# Altium PCB sunsensor.PcbDoc
Units mil, origin at the board's own origin, x right, y up, seen from the top; angles counter-clockwise.
Board outline 944.88 x 1181.1 mil, 2 copper layers (Top Layer, Bottom Layer), stack 60.4 mil thick; 56 components, 39 nets, 191 pads, 54 vias.
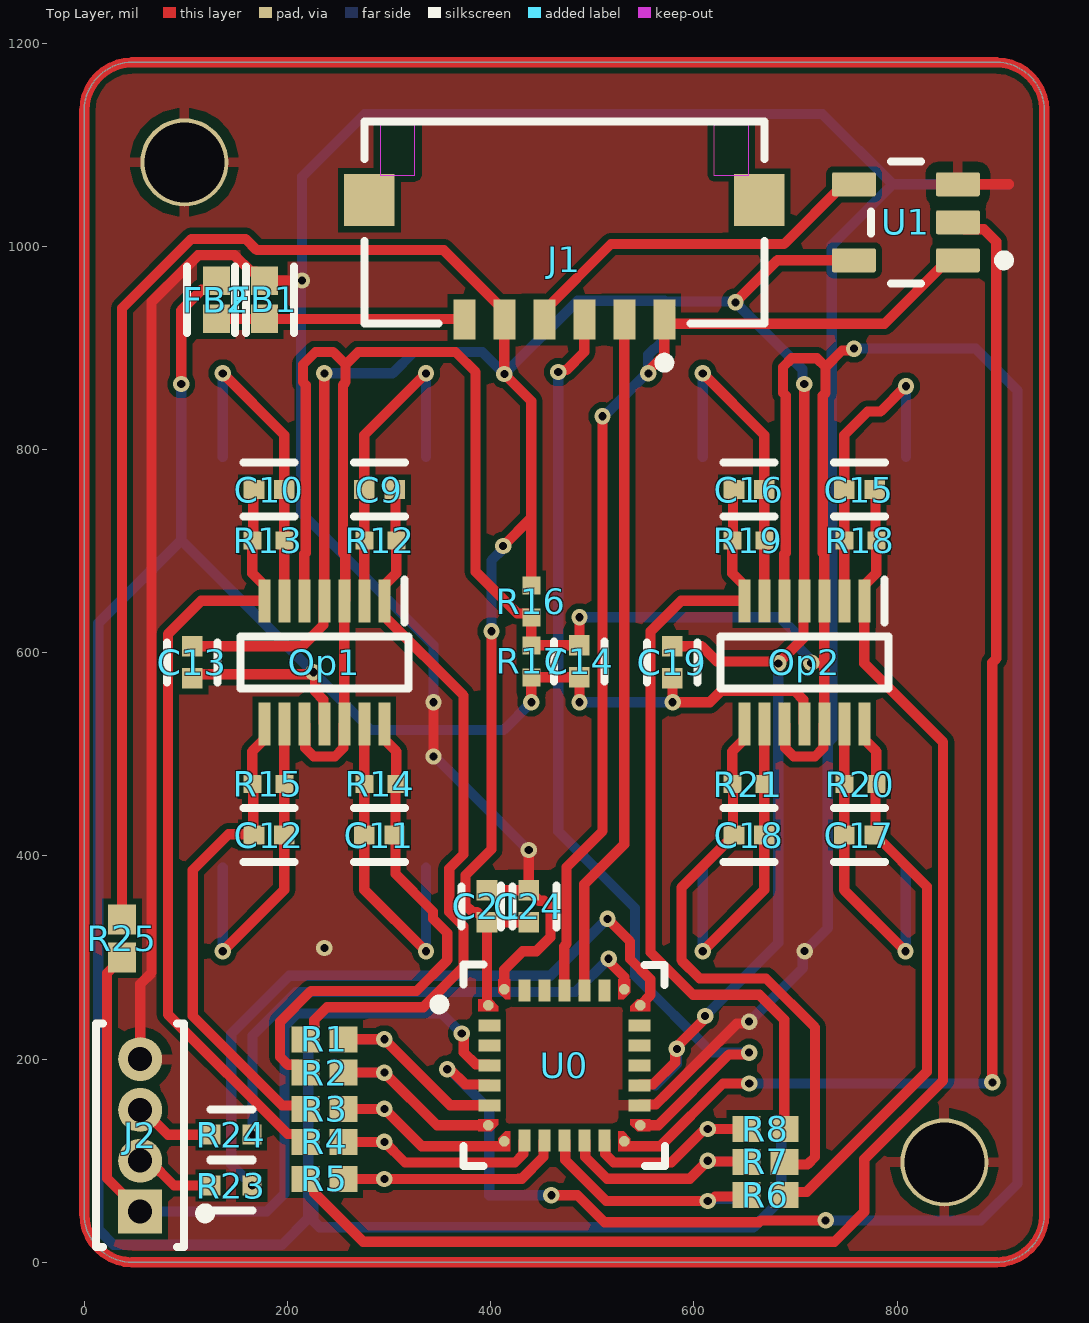
[diagram p0: Top Layer view]
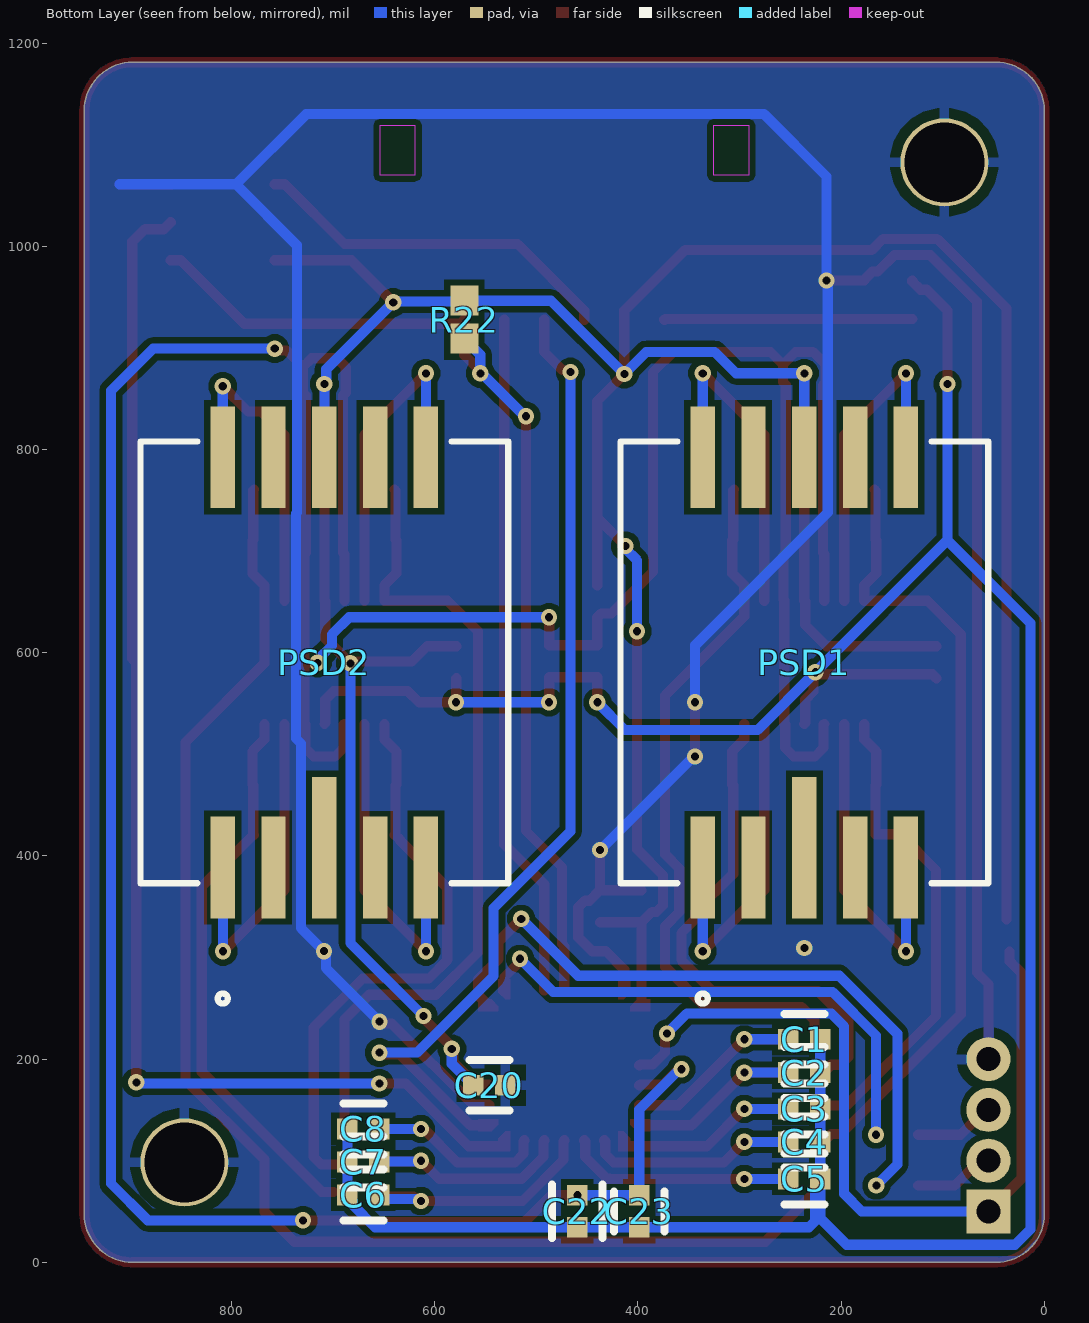
[diagram p1: Bottom Layer view, seen from below]
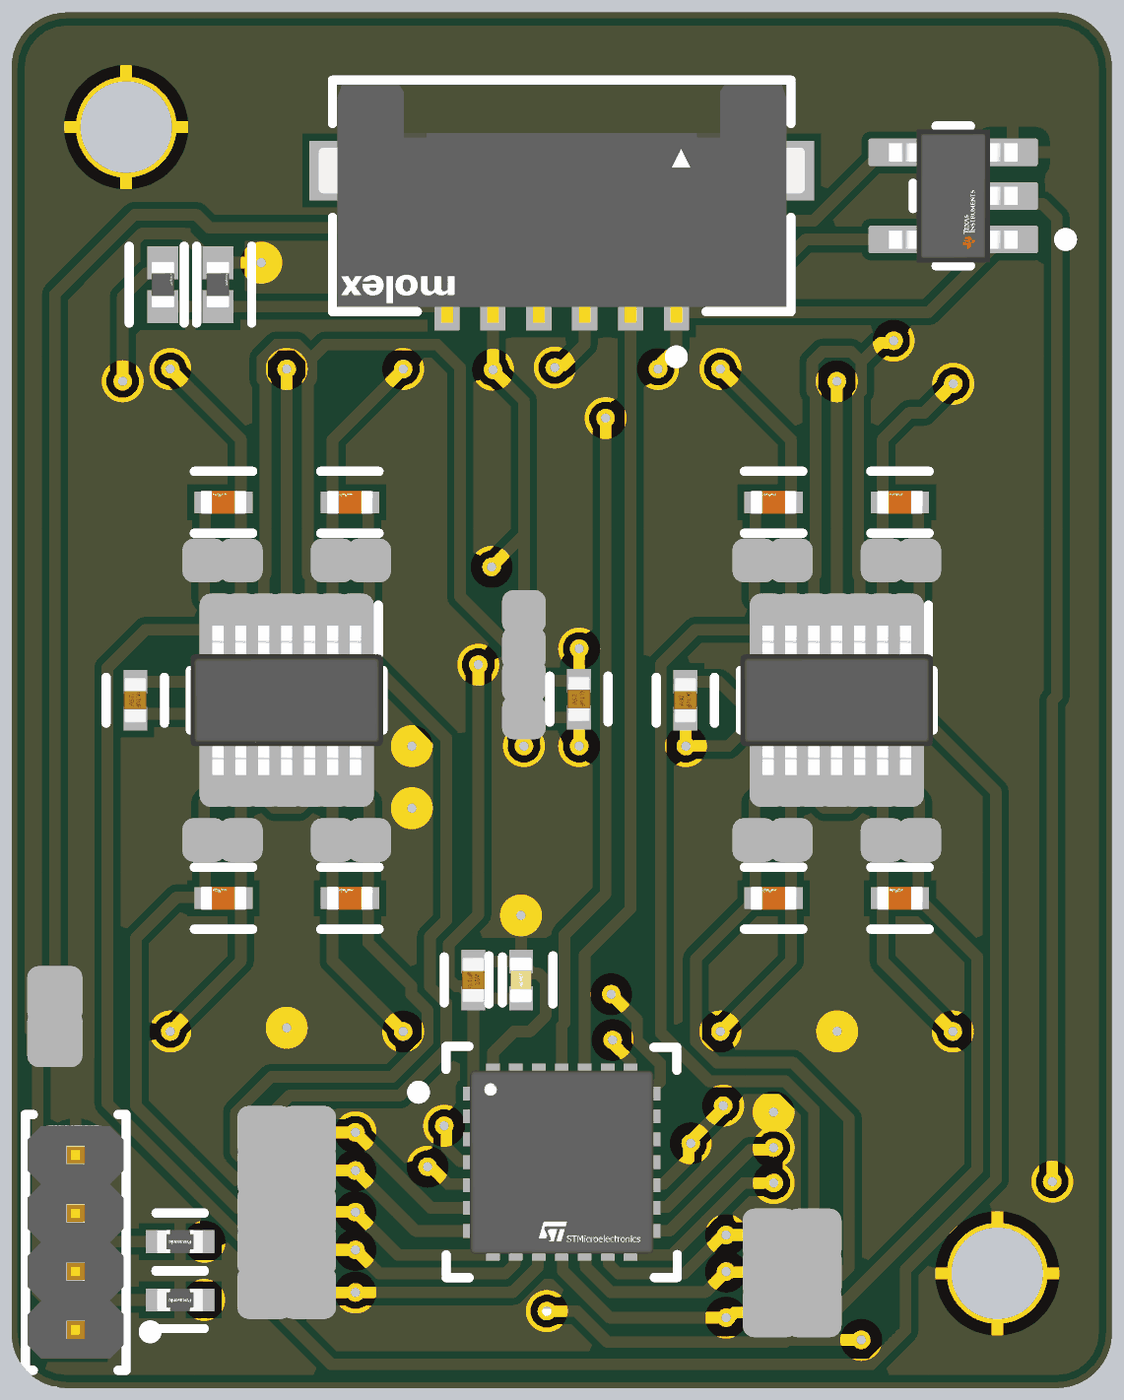
[diagram p2: 3D render of the assembled board from above, using the file's embedded part models]
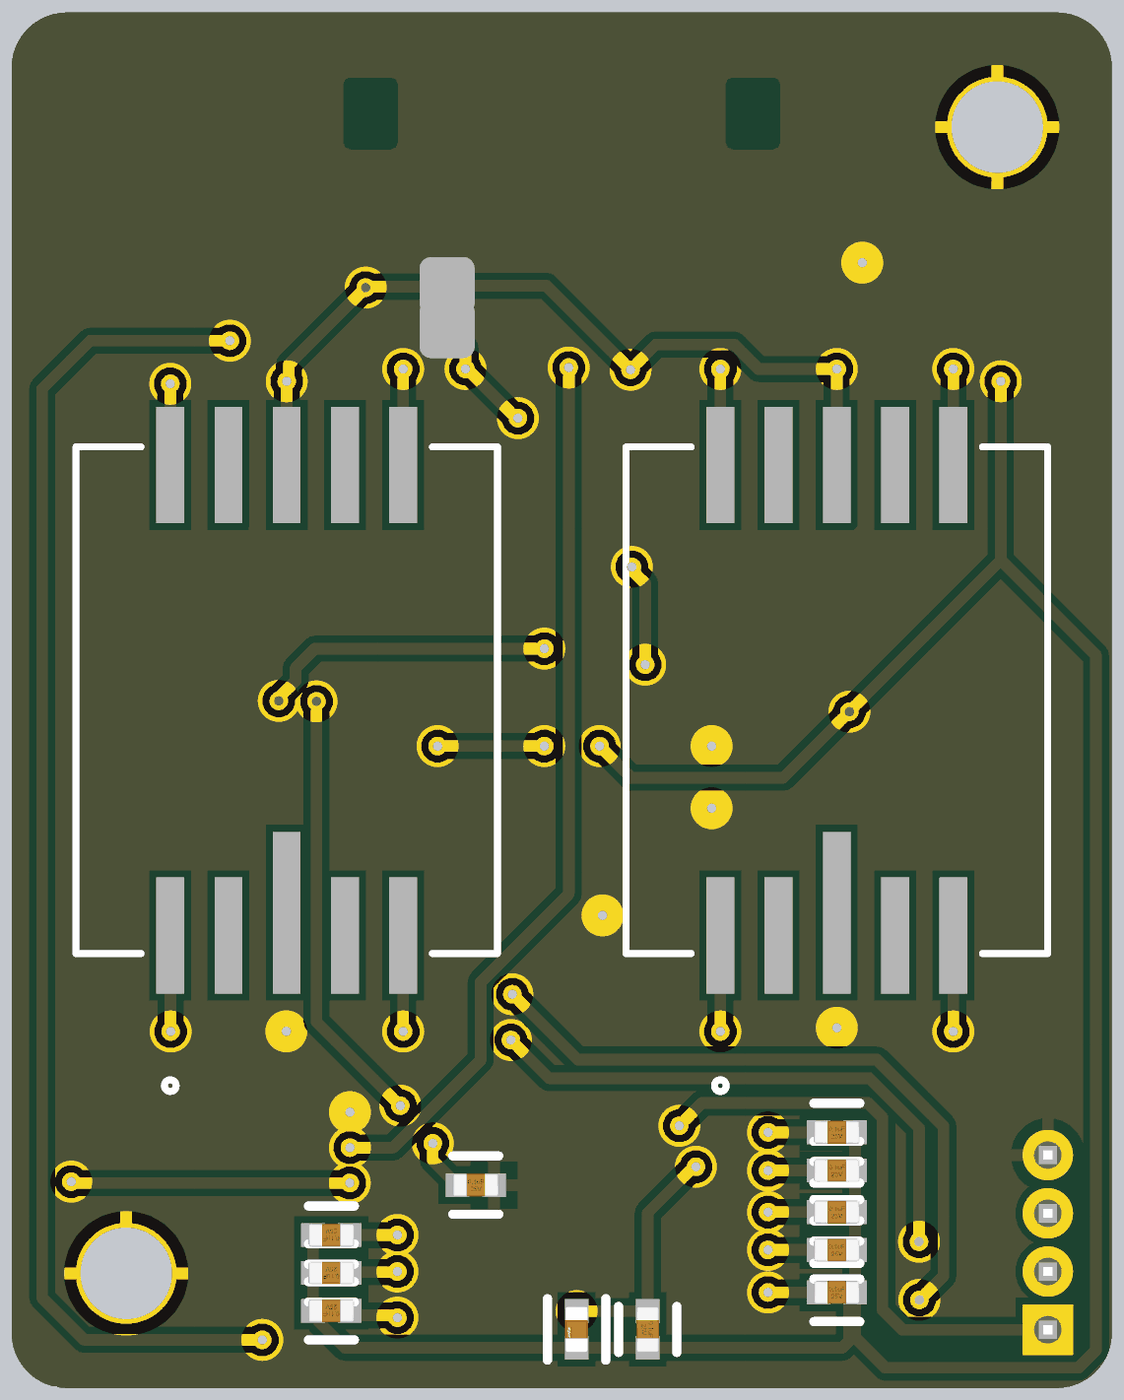
[diagram p3: 3D render of the assembled board from below, using the file's embedded part models]

## Layer stack, top to bottom
Top Solder: solder mask 0.5, Solder Resist, Dk 3.3
Top Layer: signal copper 0.7
Dielectric1: core 59, FR-4, Dk 4.3
Bottom Layer: signal copper 0.7
Bottom Solder: solder mask 0.5, Solder Resist, Dk 3.3

## Board outline
0,47.24 0,1133.86 cw(c47.24,1133.86) 47.24,1181.1 897.64,1181.1 cw(c897.64,1133.86) 944.88,1133.86 944.88,47.24 cw(c897.64,47.24) 897.64,0 47.24,0 cw(c47.24,47.24)

## Design rules (kind name [scope] priority, off if disabled: settings)
Clearance [All] p1: gap=6 ignorepadtopadclearanceinfootprint=FALSE
DiffPairsRouting [All] p1: maxlimit=10 minlimit=10 mostfreqgap=10 toplayer_minwidth=10 toplayer_maxwidth=10 toplayer_prefwidth=10 bottomlayer_minwidth=10 bottomlayer_maxwidth=10 bottomlayer_prefwidth=10 maxuncoupledlength=500
HoleSize [All] p1: absolutevalues=TRUE maxlimit=300 minlimit=10 maxpercent=80.000 minpercent=20.000
MinimumAnnularRing [All] p1: minimumring=10
PasteMaskExpansion [All] p1: expansion=10
PlaneClearance [All] p1: clearance=15
PlaneConnect [All] p1: pad.planeconnectstyle=Relief pad.reliefexpansion=20 pad.reliefentries=4 pad.reliefconductorwidth=10 pad.reliefairgap=10 via.planeconnectstyle=Direct via.reliefexpansion=20 via.reliefentries=4 via.reliefconductorwidth=10 via.reliefairgap=10
PolygonConnect [All] p1: thpad.connectstyle=Relief thpad.reliefconductorwidth=10 thpad.reliefentries=4 thpad.polygonreliefangle="90 Angle" thpad.airgapwidth=10 smdpad.connectstyle=Relief smdpad.reliefconductorwidth=10 smdpad.reliefentries=4 smdpad.polygonreliefangle="90 Angle" smdpad.airgapwidth=10 via.connectstyle=Direct via.reliefconductorwidth=10 via.reliefentries=4 via.polygonreliefangle="90 Angle" via.airgapwidth=10
RoutingVias [All] p1: holewidth=10 width=20 viastyle="Through Hole" minholewidth=10 minwidth=20 maxholewidth=10 maxwidth=20
SMDNeckDown [All] p1: percent=100.000
SilkToSolderMaskClearance SilkscreenOverComponentPads [IsPad] p1: minsilkscreentomaskgap=10 clearancetoexposedcopper=TRUE
SolderMaskExpansion [All] p1: expansion=10 istentingtop=FALSE
SupplyNets "Schematic Supply Nets_4" [InNet('GND')] p1: voltage=0.000
SupplyNets "Schematic Supply Nets" [InNet('DGND')] p2: voltage=0.000
SupplyNets "Schematic Supply Nets_2" [InNet('VDD_3V3')] p3: voltage=0.000
SupplyNets "Schematic Supply Nets_1" [InNet('AGND')] p4: voltage=0.000
Width [All] p1: maxlimit=10 minlimit=6 preferedwidth=10
24 further rules are at their usual default settings.

## Components (designator, comment, footprint, x,y, rotation, side; value= is the part's Value field where it differs from the comment)
C1 "33pF" FP-C0402-BB-MFG 236.22,219.5 r180 bottom locked value="33 pF"
C2 "33pF" FP-C0402-BB-MFG 236.22,186.7 r180 bottom locked value="33 pF"
C3 "33pF" FP-C0402-BB-MFG 236.22,151.04 r180 bottom locked value="33 pF"
C4 "33pF" FP-C0402-BB-MFG 236.22,118.56 r180 bottom locked value="33 pF"
C5 "33pF" FP-C0402-BB-MFG 236.22,82.04 r180 bottom locked value="33 pF"
C6 "33pF" FP-C0402-BB-MFG 670.26,66.29 r0 bottom locked value="33 pF"
C7 "33pF" FP-C0402-BB-MFG 670.26,98.77 r0 bottom locked value="33 pF"
C8 "33pF" FP-C0402-BB-MFG 670.26,131.25 r0 bottom locked value="33 pF"
C9 "470nF" FP-GRM155-0_05-IPC_C 290.49,760.56 r180 top locked
C10 "470nF" FP-GRM155-0_05-IPC_C 181.95,760.56 r180 top locked
C11 "470nF" FP-GRM155-0_05-IPC_C 290.49,420.56 r180 top locked
C12 "470nF" FP-GRM155-0_05-IPC_C 181.95,420.56 r180 top locked
C13 "10nF" FP-C0402-BB-MFG 106.22,590.56 r270 top locked value="10,000 pF"
C14 "0.1uF" FP-C0402-BB-MFG 487.2,591.56 r270 top locked value="0.10 μF"
C15 "470nF" FP-GRM155-0_05-IPC_C 762.92,760.56 r180 top locked
C16 "470nF" FP-GRM155-0_05-IPC_C 654.37,760.56 r180 top locked
C17 "470nF" FP-GRM155-0_05-IPC_C 762.92,420.56 r180 top locked
C18 "470nF" FP-GRM155-0_05-IPC_C 654.37,420.56 r180 top locked
C19 "10nF" FP-C0402-BB-MFG 578.65,590.56 r270 top locked value="10,000 pF"
C20 "0.1uF" FP-C0402-BB-MFG 546.26,174.22 r180 bottom locked value="0.10 μF"
C21 "0.1uF" FP-C0402-BB-MFG 396.48,350.39 r90 top locked value="0.10 μF"
C22 "1uF" FP-C0402C105K8PACTU-MFG 459.65,50.26 r270 bottom locked
C23 "0.1uF" FP-C0402-BB-MFG 398.62,50.26 r270 bottom locked value="0.10 μF"
C24 "10uF" FP-C0402C106M9PACTU-MFG 437.44,350.39 r90 top locked
FB1 "BLM15AG100SN1D" FP-BLM15-0_05-IPC_A 177.17,947.44 r90 top locked
FB2 "BLM15AG100SN1D" FP-BLM15-0_05-IPC_A 129.92,947.44 r90 top locked
J1 "503763-0691" FP-503763-0691-MFG 472.44,1023.62 r0 top locked
J2 "M50-3530442" FP-M50-3530442-MFG 55,125 r90 top locked
Op1 "TLV9004QDYYRQ1" SOP50P326X110-14N 236.22,590.56 r270 top locked
Op2 "TLV9004QDYYRQ1" SOP50P326X110-14N 708.65,590.56 r270 top locked
PSD1 "S5990-01" S5990_HAM 236.22,590.56 r90 bottom locked
PSD2 "S5990-01" S5990_HAM 708.65,590.56 r90 bottom locked
R1 "100 Ohm" RESC1005X40X25ML05T10 236.22,219.5 r0 top locked
R2 "100 Ohm" RESC1005X40X25ML05T10 236.22,186.7 r0 top locked
R3 "100 Ohm" RESC1005X40X25ML05T10 236.22,151.04 r0 top locked
R4 "100 Ohm" RESC1005X40X25ML05T10 236.22,118.56 r0 top locked
R5 "100 Ohm" RESC1005X40X25ML05T10 236.22,82.04 r0 top locked
R6 "100 Ohm" RESC1005X40X25ML05T10 670.26,66.29 r180 top locked
R7 "100 Ohm" RESC1005X40X25ML05T10 670.26,98.77 r180 top locked
R8 "100 Ohm" RESC1005X40X25ML05T10 670.26,131.25 r180 top locked
R12 "ERJ-2RKF9101X" RESC1005X40X25LL05T05 291.34,710.56 r0 top locked
R13 "ERJ-2RKF9101X" RESC1005X40X25LL05T05 181.1,710.56 r180 top locked
R14 "ERJ-2RKF9101X" RESC1005X40X25LL05T05 291.34,470.56 r0 top locked
R15 "ERJ-2RKF9101X" RESC1005X40X25LL05T05 181.1,470.56 r180 top locked
R16 "ERJ-2RKF9101X" RESC1005X40X25LL05T05 439.96,650.62 r90 top locked
R17 "ERJ-2RKF9101X" RESC1005X40X25LL05T05 439.96,591.56 r90 top locked
R18 "ERJ-2RKF9101X" RESC1005X40X25LL05T05 763.76,710.56 r0 top locked
R19 "ERJ-2RKF9101X" RESC1005X40X25LL05T05 653.53,710.56 r180 top locked
R20 "ERJ-2RKF9101X" RESC1005X40X25LL05T05 763.76,470.56 r0 top locked
R21 "ERJ-2RKF9101X" RESC1005X40X25LL05T05 653.53,470.56 r180 top locked
R22 "RK73B1ETTP104J" RESC1005X40X25ML10T10 570.87,927.76 r270 bottom locked
R23 "49.9" FP-ERJ2RK-MFG 144.64,75.6 r180 top locked
R24 "49.9" FP-ERJ2RK-MFG 144.64,125.6 r180 top locked
R25 "RK73B1ETTP104J" RESC1005X40X25ML10T10 37.15,318.9 r270 top locked
U0 "STM32L031G6U7" FP-UFQFPN28-A0B0-MFG 472.44,193.91 r0 top locked
U1 "SN74LVC1G125DBVT" FP-DBV0005A-MFG 808.65,1023.62 r180 top locked

## Footprints (in the part's own frame and the unit in brackets; to place one, negate y for a bottom-side part, rotate by r counter-clockwise, add the part's x,y. Pads: shape width x height; smd on the part's side, far side on the other; paste and mask are expansions set on the pad)
FP-503763-0691-MFG [mm]
  rect 0.55x1 smd paste+0 mask+0: 1(2.5,-2.435) 2(1.5,-2.435) 3(0.5,-2.435) 4(-0.5,-2.435) 5(-1.5,-2.435) 6(-2.5,-2.435)
  rect 1.26x1.3 smd paste+0 mask+0: 7(-4.875,0.555) 8(4.875,0.555)
  Keep-Out Layer region: 3.735,1.175 4.605,1.175 4.605,2.425 3.735,2.425
  Keep-Out Layer region: -4.605,1.175 -3.735,1.175 -3.735,2.425 -4.605,2.425
  silkscreen extent -5,-3.63 5,2.52, body extent -5.61,-3.04 5.61,2.63, height 0.25
FP-BLM15-0_05-IPC_A [mil]
  rect 28.16x26.48 smd paste+0 mask+0: 1(-18.84,0) 2(18.84,0)
  silkscreen extent -33,-29 33,29, body extent -41,-21 41,21, height 10
FP-C0402-BB-MFG [mm]
  rect 0.52x0.52 smd paste+0 mask+0: 1(-0.4,0) 2(0.4,0)
  silkscreen extent -0.5,-0.64 0.5,0.64, body extent -0.5,-0.25 0.5,0.25, height 0.55
FP-C0402C105K8PACTU-MFG [mm]
  rect 0.52x0.52 smd paste+0 mask+0: 1(-0.4,0) 2(0.4,0)
  silkscreen extent -0.67,-0.64 0.67,0.64, body extent -0.5,-0.25 0.5,0.25, height 0.55
FP-C0402C106M9PACTU-MFG [mm]
  rect 0.52x0.52 smd paste+0 mask+0: 1(-0.4,0) 2(0.4,0)
  silkscreen extent -0.53,-0.7 0.53,0.7, body extent -0.76,-0.38 0.76,0.38, height 0.25
FP-DBV0005A-MFG [mm]
  rrect17% 1.1x0.6 smd paste+0 mask+0: 1(-1.3,0.95) 2(-1.3,0) 3(-1.3,-0.95) 4(1.3,-0.95) 5(1.3,0.95)
  silkscreen extent -2.58,-1.53 0.87,1.53, body extent -1.95,-1.78 1.95,1.78, height 0.25
FP-ERJ2RK-MFG [mm]
  rect 0.475x0.5 smd paste+0 mask+0: 1(-0.513,0) 2(0.513,0)
  silkscreen extent -0.53,-0.63 0.53,0.63, body extent -0.85,-0.38 0.85,0.38, height 0.25
FP-GRM155-0_05-IPC_C [mil]
  rect 20.29x18.6 smd paste+0 mask+0: 1(-14.9,0) 2(14.9,0)
  silkscreen extent -25,-27 25,27, body extent -29,-15 29,15, height 10
FP-M50-3530442-MFG [mm]
  rect 1.1x1.1 hole 0.6 paste-2539.97 mask+0: 1(-1.905,0)
  round 1.1 hole 0.6 paste-2539.97 mask+0: 2(-0.635,0) 3(0.635,0) 4(1.905,0)
  silkscreen extent -2.79,-1.75 2.79,1.1, body extent -2.89,-1.2 2.89,1.2, height 0.25
FP-UFQFPN28-A0B0-MFG [mm]
  round 0.27 smd paste+0 mask+0: 1(-1.9,1.5) 7(-1.9,-1.5) 8(-1.5,-1.9) 14(1.5,-1.9) 15(1.9,-1.5) 21(1.9,1.5) 22(1.5,1.9) 28(-1.5,1.9)
  rect 0.55x0.3 smd paste+0 mask+0: 2(-1.875,1) 3(-1.875,0.5) 4(-1.875,0) 5(-1.875,-0.5) 6(-1.875,-1) 16(1.875,-1) 17(1.875,-0.5) 18(1.875,0) 19(1.875,0.5) 20(1.875,1)
  rect 0.3x0.55 smd paste+0 mask+0: 9(-1,-1.875) 10(-0.5,-1.875) 11(0,-1.875) 12(0.5,-1.875) 13(1,-1.875) 23(1,1.875) 24(0.5,1.875) 25(0,1.875) 26(-0.5,1.875) 27(-1,1.875)
  Top Layer region: -1.35,1.65 -1.48,1.65 -1.65,1.82 -1.65,2.15 -1.35,2.15 -1.35,1.65
  Top Layer region: 1.35,1.65 1.48,1.65 1.65,1.82 1.65,2.15 1.35,2.15 1.35,1.65
  Top Layer region: -1.65,1.35 -1.65,1.48 -1.82,1.65 -2.15,1.65 -2.15,1.35 -1.65,1.35
  Top Layer region: 1.35,-1.65 1.48,-1.65 1.65,-1.82 1.65,-2.15 1.35,-2.15 1.35,-1.65
  Top Layer region: -1.35,-1.65 -1.48,-1.65 -1.65,-1.82 -1.65,-2.15 -1.35,-2.15 -1.35,-1.65
  Top Layer region: 1.65,1.35 1.65,1.48 1.82,1.65 2.15,1.65 2.15,1.35 1.65,1.35
  Top Layer region: 1.65,-1.35 1.65,-1.48 1.82,-1.65 2.15,-1.65 2.15,-1.35 1.65,-1.35
  Top Layer region: -1.65,-1.35 -1.65,-1.48 -1.82,-1.65 -2.15,-1.65 -2.15,-1.35 -1.65,-1.35
  silkscreen extent -3.25,-2.52 2.52,2.52, body extent -2.25,-2.25 2.25,2.25, height 0.25
RESC1005X40X25LL05T05 [mm] "Chip Resistor, 2-Leads, Body 1.00x0.50mm, IPC High Density"
  rect 0.45x0.45 smd: 1(-0.4,0) 2(0.4,0)
  body extent -0.53,-0.27 0.53,0.28, height 0.4
RESC1005X40X25ML05T10 [mm] "Chip Resistor, 2-Leads, Body 1.00x0.50mm, IPC Low Density"
  rect 0.7x0.65 smd: 1(-0.475,0) 2(0.475,0)
  body extent -0.53,-0.27 0.53,0.28, height 0.4
RESC1005X40X25ML10T10 [mm] "Chip Resistor, 2-Leads, Body 1.00x0.50mm, IPC Low Density"
  rect 0.75x0.7 smd: 1(-0.475,0) 2(0.475,0)
  body extent -0.55,-0.3 0.55,0.3, height 0.4
S5990_HAM [mil]
  rect 100x24 smd paste+0 mask+0: 1(-201.97,100) 2(-201.97,50) 4(-201.97,-50) 5(-201.97,-100) 6(201.97,-100) 7(201.97,-50) 8(201.97,0) 9(201.97,50) 10(201.97,100)
  rect 139x24 smd paste+0 mask+0: 3(-182.47,0)
  silkscreen extent -336,-181 218,181
SOP50P326X110-14N [mm]
  rect 1.075x0.3 smd: 1(-1.538,1.5) 2(-1.538,1) 3(-1.538,0.5) 4(-1.538,0) 5(-1.538,-0.5) 6(-1.538,-1) 7(-1.538,-1.5) 8(1.538,-1.5) 9(1.538,-1) 10(1.538,-0.5) 11(1.538,0) 12(1.538,0.5) 13(1.538,1) 14(1.538,1.5)
  silkscreen extent -2.07,-2.1 0.65,2.1, body extent -1.63,-2.1 1.63,2.1, height 1.02

## Part data
C1 C2 C3 C4 C5 C6 C7 C8: library part CMP-2008-03563-2, "CAP CER 33PF 50V C0G/NP0 0402", Capacitance="33 pF", Manufacturer=Kemet, Manufacturer Part Number=C0402C330F5GACTU, Package=C0402-BB, Temperature="-55°C to +125°C", Temperature Characteristic=C0G, Temperature Coefficient=15%, Temperature Range High=+125°C, Temperature Range Low=-55°C, Tolerance=0.01, Voltage Rating="50 V", Automotive=No, Category=Cap, ComponentLink2Description=Datasheet, ComponentLink2URL=https://content.kemet.com/datasheets/KEM_C1002_X7R_SMD.pdf, Device Class L1="Passive Components", Device Class L2=Capacitors, Device Class L3="Ceramic Capacitors", Digikey Description="CAP CER 33PF 50V C0G/NP0 0402", Height=0.55mm, Ipc Land Pattern Name=CAPC10050X50, Lead Free=Yes, Material=Ceramic, Mouser Description="Multilayer Ceramic Capacitors MLCC - SMD/SMT 50volts 33pF C0G 1%", Octopart=https://octopart.com/c0402c330f5gactu-kemet-17141442, RoHS=TRUE
C9 C10 C11 C12 C15 C16 C17 C18: library part CMP-06035-042090-1, "Chip Multilayer Ceramic Capacitors for General Purpose, 0402, 0.47uF, X7R, 15%, 10%, 10V", Case/Package=0402, Tolerance=10%, Voltage Rating (DC)=10V, Capacitance=470nF, Height=0.3mm, Lead Free="Lead Free", Length=1mm, Material=Ceramic, Thickness=500um, Width=0.5mm
C13 C19: library part CMP-2008-02109-2, "CAP CER 10000PF 50V X7R 0402", Capacitance="10,000 pF", Manufacturer=Kemet, Manufacturer Part Number=C0402C103K5RACTU, Package=C0402-BB, Temperature="-55°C to +125°C", Temperature Characteristic=X7R, Temperature Coefficient=15%, Temperature Range High=+125°C, Temperature Range Low=-55°C, Tolerance=0.1, Voltage Rating="50 V", Automotive=No, Category=Cap, ComponentLink2Description=Datasheet, ComponentLink2URL=https://content.kemet.com/datasheets/KEM_C1002_X7R_SMD.pdf, Device Class L1="Passive Components", Device Class L2=Capacitors, Device Class L3="Ceramic Capacitors", Digikey Description="CAP CER 10000PF 50V X7R 0402", Height=0.55mm, Ipc Land Pattern Name=CAPC10050X50, Lead Free=Yes, Material=Ceramic, Mouser Description="Capacitor; Ceramic; Cap; .010uF; Tol 10%; SMT; Vol-Rtg 50V; X7R; Tape and Reel", Octopart=https://octopart.com/c0402c103k5ractu-kemet-95985, RoHS=TRUE
C14 C20 C21 C23: library part CMP-2008-02108-2, "CAP CER 0.1UF 16V X7R 0402", Capacitance="0.10 μF", Manufacturer=Kemet, Manufacturer Part Number=C0402C104K4RACTU, Package=C0402-BB, Temperature="-55°C to +125°C", Temperature Characteristic=X7R, Temperature Coefficient=15%, Temperature Range High=+125°C, Temperature Range Low=-55°C, Tolerance=0.1, Voltage Rating="16 V", Automotive=No, Category=Cap, ComponentLink2Description=Datasheet, ComponentLink2URL=https://content.kemet.com/datasheets/KEM_C1002_X7R_SMD.pdf, Device Class L1="Passive Components", Device Class L2=Capacitors, Device Class L3="Ceramic Capacitors", Digikey Description="CAP CER 0.1UF 16V X7R 0402", Height=0.55mm, Ipc Land Pattern Name=CAPC10050X50, Lead Free=Yes, Material=Ceramic, Mouser Description="Cap Ceramic 0.1uF 16V X7R 10% SMD 0402 125?C Paper T/R - Tape and Reel (Alt: C0402C104K4RAC TU)", Octopart=https://octopart.com/c0402c104k4ractu-kemet-94158, RoHS=TRUE
C22: library part CMP-2008-02081-2, "CAP CER 1UF 10V X5R 0402", Case Code (Imperial)=0402, Case Code (Metric)=1005, Dielectric=X5R, Dielectric Material=Ceramic, Max Operating Temperature=85°C, Min Operating Temperature=-55°C, Package Quantity=1, Tolerance=10%, Voltage=10V, Capacitance=1uF, Case/Package=0402, Construction=Flat, Contact Plating=Tin, Depth=0.5mm, Dissipation Factor=5%, Height=0.5mm, Lead Free="Lead Free", Length=1mm, Mount="Surface Mount", Number of Pins=2, Packaging="Tape and Reel", Radiation Hardening=No, REACH SVHC="No SVHC", RoHS Compliant=Yes, Series=C, Termination=SMD/SMT, Thickness=0.022inch, Voltage Rating=10V, Voltage Rating (DC)=10V, Width=0.5mm
C24: library part CMP-03020-034678-1, "CAP CER 10UF 6.3V X5R 0402", Case Code (Imperial)=0402, Case Code (Metric)=1005, Dielectric=X5R, Dielectric Material=Ceramic, Max Operating Temperature=85°C, Min Operating Temperature=-55°C, Tolerance=20%, Voltage Rating=6.3V, Capacitance=10uF, Case/Package=0402, Lead Free="Lead Free", Length=0.039inch, Mount="Surface Mount", Packaging="Cut Tape", REACH SVHC="No SVHC", RoHS Compliant=Yes, Thickness=0.028inch, Voltage Rating (DC)=6.3V, Width=0.02inch
FB1 FB2: library part CMP-0686-00176-4, "Chip Ferrite Bead, 0402, 10Ω @ 100MHz, 0.025Ω, 25%, 1A", Case Code (Imperial)=0402, Case Code (Metric)=1005, Current Rating=1A, DC Resistance (DCR)=25mR, Max Operating Temperature=125°C, Min Operating Temperature=-55°C, Package Quantity=1, Resistance=50mR, Resistor Type="Ferrite Bead", Test Frequency=100MHz, Tolerance=25%, Case/Package=0402, Core Material=Ferrite, DC Current=1A, Depth=0.55mm, Height=0.5mm, Impedance=10R, Lead Free="Lead Free", Length=1mm, Material=Ferrite, Max Current Rating=1A, Max DC Current=1A, Military Standard=Not, Number of Circuits=1, Number of Lines=1, Number of Pins=2, Packaging="Tape and Reel", Radiation Hardening=No, REACH SVHC="No SVHC", RoHS Compliant=Yes, Shielding=Unshielded, Termination=SMD/SMT, Weight=2.3E-05oz, Width=0.5mm
J1: library part CMP-04776-000530-1, "CONN HEADER SMD R/A 6POS 1MM"
J2: library part CMP-15831-000059-1, "CONN HEADER VERT 4POS 1.27MM", Current Rating=1A, Flammability Rating="UL94 V-0", Insulation Color=Black, Max Operating Temperature=105°C, Min Operating Temperature=-40°C, Connector Type=Header, Contact Material=Brass, Contact Plating=Gold, Contact Shape=Square, Fastening Type=Push, Insulation Material=Nylon, Mount="Through Hole", Number of Positions=4, Number of Rows=1, Packaging=Bulk, Termination=Solder
Op1 Op2: "Integrated Circuit", Manufacturer_Name="Texas Instruments", Mouser Part Number=595-TLV9004QDYYRQ1, Arrow Part Number=TLV9004QDYYRQ1, Arrow Price/Stock=https://www.arrow.com/en/products/tlv9004qdyyrq1/texas-instruments?utm_currency=USD&region=nac, Datasheet Link=https://www.ti.com/lit/ds/symlink/tlv9004-q1.pdf?ts=1653903936376&ref_url=https%253A%252F%252Fwww.ti.com%252Fproduct%252FTLV9004-Q1%252Fpart-details%252FTLV9004QDYYRQ1, Height=1.1mm, Manufacturer_Part_Number=TLV9004QDYYRQ1, Mouser Price/Stock=https://www.mouser.co.uk/ProductDetail/Texas-Instruments/TLV9004QDYYRQ1?qs=A6eO%252BMLsxmQxCVD4nSHH0g%3D%3D
PSD1 PSD2: library part CMP-075-000001-1, "No Description Available", Mfr_Name=Hamamatsu, Design Item ID=S5990-01, RefDes=RefDes, Source=S5990-01.SchLib, Type="Position Sensors - Angle, Linear Position Measuring"
R1 R2 R3 R4 R5 R6 R7 R8: library part CMP-2002-06458-1, Manufacturer=Panasonic, Part Number=ERJ-U02F1000X
R12 R13 R14 R15 R16 R17 R18 R19 R20 R21: library part CMP-1011-00619-2, Manufacturer=Panasonic, Part Number=ERJ-2RKF9101X
R22 R25: library part CMP-2002-03715-1, Manufacturer="KOA Speer", Part Number=RK73B1ETTP104J
R23 R24: library part CMP-2002-00969-2, "RES SMD 49.9 OHM 1% 1/10W 0402", Case Code (Imperial)=0402, Case Code (Metric)=1005, Max Operating Temperature=155°C, Max Power Dissipation=100mW, Min Operating Temperature=-55°C, Package Quantity=1, Resistance=49.9R, Resistance Tolerance=1%, Resistor Type="Thick Film", Temperature Coefficient=100ppm/°C, Voltage Rating=50V, Case/Package=0402, Construction=Rectangular, Contact Plating=Tin, Depth=0.5mm, Features="Automotive AEC-Q200", Height=0.35mm, Lead Free="Lead Free", Length=1mm, Military Standard=Not, Mount="Surface Mount", Number of Terminations=2, Packaging="Tape and Reel", Power Rating=100mW, Radiation Hardening=No, RoHS Compliant=Yes, Series=ERJ, Technology="THICK FILM", Termination=SMD/SMT, Tolerance=1%, Voltage Rating (DC)=50V, Width=0.02inch, Working Voltage=50V
U0: library part CMP-12105-000084-1, "IC MCU 32BIT 32KB FLASH 28UFQFPN", Frequency=32MHz, Max Operating Temperature=105°C, Max Power Dissipation=167mW, Max Supply Voltage=3.6V, Min Operating Temperature=-40°C, Min Supply Voltage=1.8V, Operating Supply Voltage=3.3V, Core Architecture=ARM, Interface=I2C, Lead Free="Lead Free", Max Frequency=32MHz, Memory Size=32KB, Memory Type=FLASH, Mount="Surface Mount", Number of I/Os=21, Number of Pins=28, Number of Programmable I/O=21, Number of Timers/Counters=4, Oscillator Type=Internal, Peripherals="Brown-out Detect/Reset", RAM Size=1KB, Watchdog Timer=Yes
U1: library part CMP-0859-00018-4, "IC BUF NON-INVERT 5.5V SOT23-5", Ambient Temperature Range High=+125°C, Ambient Temperature Range Low=-40°C, Manufacturer="Texas Instruments", Max Supply Voltage=5.5V, Min Supply Voltage=1.65V, Nominal Supply Current=10uA, Package=DBV0005A, Temperature="-40°C to +125°C", Automotive=No, Category=IC, ComponentLink2Description=Datasheet, ComponentLink2URL=http://www.ti.com/lit/ds/symlink/sn74lvc1g125.pdf, Device Class L1="Integrated Circuits (ICs)", Device Class L2="Logic ICs", Device Class L3="Logic Gates", Digikey Description="IC BUF NON-INVERT 5.5V SOT23-5", Height=1.45mm, Lead Free=Yes, Logic Function Desc=Non-Inverting, Manufacturer Part Number=SN74LVC1G125DBVT, Mouser Description="Buffers & Line Drivers SNGL Bus Buffer Gate", Number of Circuits=1, Number Of Inputs=1, Number of Outputs=1, Octopart=https://octopart.com/sn74lvc1g125dbvt-texas+instruments-1006799, Propagation Delay=4.2ns, RoHS=TRUE, Standoff Height=0mm, Temperature Range High=+125°C, Temperature Range Low=-40°C

## Free pads (board coordinates)
  round 86.61 hole 78.74: 1(98.43,1082.68) 2(846.46,98.43)

## Via types
v1: diameter 16, hole 8, Top Layer to Bottom Layer, 54 vias

## Nets (pads, with @x,y where several pads share a name; then routed paths per layer and width w, separated by ;. In a path a pad name is that pad's centre, name@x,y a point inside that pad or via, vN(x,y) a via of type N, cw(c..) or ccw(c..) an arc to the next point about the centre after c; other vN are vias at no path point)
AGND: C1.2 C2.2 C3.2 C4.2 C5.2 C6.2 C7.2 C8.2 C13.2 C14.2 C19.2 C22.2 C23.2 FB2.2 Op1.11 Op2.11 R17.1 | length 2955.9
  Top Layer w10: v1(95.39,864.43) 95.39,936.95 115.65,957.2 121.68,957.2 129.92,965.44 FB2.2 ; C13.2 110.23,578.82 223.48,578.82 v1(225.39,580.74) 227.31,578.82 227.31,561.86 235.31,553.85 235.31,530.91 Op1.11 ; v1(439.96,551.19) R17.1 C14.2 487.32,575.7 487.32,551.31 v1(487.44,551.19) ; C19.2 578.85,574.6 578.85,551.4 v1(579.06,551.19) 615.51,551.19 626.49,562.17 699.42,562.17 707.74,553.85 707.74,530.91 Op2.11
  Bottom Layer w10: v1(95.39,864.43) 95.39,710.74 ; C1.2 C2.2 C3.2 C4.2 C5.2 ; v1(439.96,551.19) 412.71,523.94 282.19,523.94 v1(225.39,580.74) 95.39,710.74 ; v1(487.44,551.19) v1(579.06,551.19) ; C8.2 C7.2 C6.2 680.77,61.06 680.77,56.52 658.76,34.51 231.57,34.51 225.71,40.37 225.71,76.8 C5.2 ; 95.39,710.74 13.66,629 13.66,32.48 28.79,17.35 194.6,17.35 220.47,43.22 C5.2
DGND: C20.2 C21.2 C24.2 FB1.2 J2.4 pad.1 pad.2 U0.16 U0.28 U1.3 | length 3727
  Top Layer w10: J2.4 55,273.94 66.22,285.17 66.22,945.46 112.13,991.36 147.72,991.36 163.72,975.36 168.93,975.36 177.17,967.13 FB1.2 v1(214.36,966.28) ; v1(343.73,497.85) v1(343.73,551.19) ; C21.2 C24.2 ; U0.28 413.39,288.05 431.44,306.11 444.94,306.11 458.68,319.85 458.68,349.44 452.23,355.88 447.7,355.88 C24.2 ; v1(437.44,405.8) C24.2 ; U0.16 547.17,155.44 562.71,155.44 642.2,234.93 652.46,234.93 v1(654.37,236.85) ; U1.3 910.02,1061.02
  Bottom Layer w10: v1(343.73,497.85) 344.91,497.85 436.96,405.8 v1(437.44,405.8) ; v1(343.73,551.19) 343.73,607.46 213.22,737.97 213.22,965.15 v1(214.36,966.28) 214.36,1068.69 275.76,1130.09 726.59,1130.09 795.65,1061.02 ; v1(654.37,236.85) 707.07,289.54 707.07,304.34 731.65,328.91 731.65,510.67 736.46,515.49 736.46,737.15 735.65,737.97 735.65,1001.01 795.65,1061.02 ; 910.02,1061.02 795.65,1061.02
  other v1: 708.98,306.25 236.22,309.29
GND: FB1.1 FB2.1 J1.6 | length 244.4
  Top Layer w10: FB2.1 FB1.1 373.17,928.6 J1.6
NCS: J1.1 R22.2 U0.25 U1.1 | length 1060.4
  Top Layer w10: U0.25 472.44,310.99 474.68,313.23 474.68,389.17 510.12,424.61 v1(510.12,832.79) ; v1(555.12,875) 555.12,877.32 570.87,893.07 J1.1@570.87,918.9 ; J1.1 J1.1@570.87,918.9 ; U1.1 849.98,986.22 787.55,923.79 575.75,923.79 J1.1@570.87,918.9
  Bottom Layer w10: v1(510.12,832.79) 511.52,832.79 553.72,875 v1(555.12,875) 555.12,893.31 561.1,899.29 562.09,899.29 570.87,908.07 R22.2
NetC1_1: C1.1 R1.2 U0.6 | length 213.9
  Top Layer w10: R1.2 v1(295.28,219.5) 360.24,154.54 U0.6
  Bottom Layer w10: C1.1 v1(295.28,219.5)
NetC2_1: C2.1 R2.2 U0.7 | length 207.5
  Top Layer w10: R2.2 v1(295.28,186.7) 347.13,134.85 U0.7
  Bottom Layer w10: C2.1 v1(295.28,186.7)
NetC3_1: C3.1 R3.2 U0.8 | length 217
  Top Layer w10: R3.2 v1(295.28,151.04) 332.06,114.26 U0.8@413.39,114.26
  Bottom Layer w10: C3.1 v1(295.28,151.04)
NetC4_1: C4.1 R4.2 U0.9 | length 246.3
  Top Layer w10: R4.2 v1(295.28,118.56) 315.57,98.26 423.85,98.26 432.17,106.58 432.17,119.18 U0.9
  Bottom Layer w10: C4.1 v1(295.28,118.56)
NetC5_1: C5.1 R5.2 U0.10 | length 266
  Top Layer w10: R5.2 v1(295.28,82.04) 427.31,82.04 427.53,82.26 430.47,82.26 451.85,103.64 451.85,119.18 U0.10
  Bottom Layer w10: C5.1 v1(295.28,82.04)
NetC6_1: C6.1 R6.2 U0.11 | length 260.5
  Top Layer w10: U0.11 473.35,119.18 473.35,100.69 513.65,60.39 616.31,60.39 620.74,64.82 650.08,64.82 R6.2
  Bottom Layer w10: v1(613.6,60.39) 615.52,62.3 650.52,62.3 C6.1
NetC7_1: C7.1 R7.2 U0.12 | length 233.5
  Top Layer w10: U0.12 493.03,119.18 493.03,103.64 514.41,82.26 595.82,82.26 v1(613.56,100) 614.18,99.39 650.95,99.39 R7.2
  Bottom Layer w10: v1(613.56,100) 614.18,99.39 653.9,99.39 C7.1
NetC8_1: C8.1 R8.2 U0.13 | length 210.9
  Top Layer w10: U0.13 512.72,119.18 512.72,106.58 521.04,98.26 577.78,98.26 610.86,131.34 v1(613.56,131.34) v1(613.56,131.34) 651.52,131.3 R8.2
  Bottom Layer w10: v1(613.56,131.34) v1(613.56,131.34) C8.1 C8.1
NetJ2_2: J2.2 R23.2 | length 79.6
  Top Layer w10: J2.2 63.86,100 88.26,75.6 R23.2
NetJ2_3: J2.3 R24.2 | length 79.6
  Top Layer w10: J2.3 58.03,150 82.43,125.6 R24.2
nRESET: J2.1 R25.2 U0.4 | length 826.2
  Top Layer w10: R25.2@34.12,306.02 34.12,296.18 28.37,290.43 28.2,290.43 22.35,284.58 22.35,82.65 J2.1 ; v1(371.48,225.14) 373.39,223.23 373.39,206.53 385.11,194.81 397.72,194.81 U0.4
  Bottom Layer w10: J2.1 179.7,50 197.04,67.34 197.04,232.09 209.77,244.82 351.8,244.82 v1(371.48,225.14)
SPI_MISO: J1.4 U1.4 | length 365.1
  Top Layer w10: J1.4 452.76,936.61 518.36,1002.22 688.82,1002.22 747.62,1061.02 U1.4
SPI_MOSI: J1.3 U0.15 | length 971.7
  Top Layer w10: v1(466.44,876.24) 468.35,878.15 474.29,878.15 492.13,895.99 J1.3 ; U0.15 547.36,134.97 564.87,134.97 634.37,204.47 652.46,204.47 v1(654.37,206.39)
  Bottom Layer w10: v1(466.44,876.24) 466.44,424.26 542.04,348.67 542.04,281.75 617.4,206.39 v1(654.37,206.39)
SPI_SCK: J1.2 U0.24 | length 676.3
  Top Layer w10: U0.24 492.13,372.15 531.5,411.52 J1.2
SUN_SPI_MISO: U0.14 U1.2 | length 1262.9
  Top Layer w10: U0.14@531.5,114.26 566.78,114.26 628.56,176.04 v1(654.51,176.04) ; U1.2 866.64,1016.81 885.31,1016.81 897.64,1004.49 897.64,594.15 893.7,590.21 v1(893.7,177.17)
  Bottom Layer w10: v1(654.51,176.04) 892.58,176.04 v1(893.7,177.17)
SWCLK: R24.1 U0.22 | length 516.7
  Top Layer w10: R24.1 v1(165.64,125.6) ; v1(516.09,298.79) 516.09,296.09 531.38,280.8 531.38,268.83 U0.22
  Bottom Layer w10: v1(165.64,125.6) 165.64,223.32 208.34,266.02 483.32,266.02 v1(516.09,298.79)
SWDIO: R23.1 U0.21 | length 682
  Top Layer w10: R23.1 v1(165.31,75.6) ; v1(514.88,338.09) 537.09,315.88 537.09,298.62 557.09,278.62 557.09,262.98 547.36,253.25 U0.21@547.36,253.08
  Bottom Layer w10: v1(165.31,75.6) 144.64,96.27 144.64,224.94 167.24,247.54 201.71,282.02 458.69,282.02 514.76,338.09 v1(514.88,338.09)
VDD_3V3: C13.1 C19.1 C20.1 C21.1 C24.1 J1.5 Op1.4 Op2.4 PSD1.8 PSD2.8 R16.2 R22.1 R25.1 U0.1 U0.17 U1.5 | length 4029.6
  Top Layer w10: R25.1 37.15,939.02 105.5,1007.36 158.71,1007.36 169.82,996.25 353.75,996.25 413.39,936.61 J1.5 v1(413.39,874.34) 439.96,847.77 439.96,733.98 439.96,732.79 ; C13.1 214.36,606.31 235.31,627.27 235.31,650.21 Op1.4 v1(236.22,875) ; U0.1 397.64,253.13 396.48,254.29 C21.1 ; v1(400.79,621.09) 400.79,406.48 375.24,380.93 375.24,351.35 381.69,344.91 386.22,344.91 C21.1 ; v1(412.22,705.05) 439.96,732.79 ; C24.1 C21.1 ; R16.2 439.96,732.79 ; U0.17 547.17,175.13 559.77,175.13 581.63,196.99 581.63,208.53 v1(583.21,210.11) 583.21,212.31 611.09,240.19 v1(611.09,242.4) ; C19.1 607.58,606.31 622.41,591.48 v1@681.14,591.48 ; v1(640.83,944.88) 682.16,986.22 U1.5 ; v1(683.06,589.57) 707.74,614.25 707.74,650.2 Op2.4 v1(708.65,864.43)
  Bottom Layer w10: PSD1.8 v1(236.22,875) 303.47,875 324.47,896 391.73,896 v1(413.39,874.34) 485.5,946.46 R22.1 571.65,945.67 640.04,945.67 v1(640.83,944.88) 706.73,878.97 706.73,866.35 v1(708.65,864.43) PSD2.8 ; v1(400.79,621.09) 400.79,690.91 412.22,702.34 v1(412.22,705.05) ; C20.1 583.21,195.42 v1(583.21,210.11) ; v1(611.09,242.4) 683.06,314.37 v1(683.06,589.57)
VREF: C14.1 C22.1 C23.1 Op1.3 Op1.5 Op1.10 Op1.12 Op2.3 Op2.5 Op2.10 Op2.12 R16.1 R17.2 U0.5 | length 3974.4
  Top Layer w10: Op1.10 217.44,529.1 217.44,506.16 225.76,497.85 246.68,497.85 255,506.16 255,529.1 Op1.12 Op1.3 256.81,652.02 256.81,696.07 254.45,698.43 254.45,863.53 257.22,866.3 257.22,883.7 ; Op1.5 216.54,696.97 218,698.43 218,863.53 215.22,866.3 215.22,883.7 227.52,896 244.92,896 257.22,883.7 ; v1(357.22,189.97) 359.93,189.97 374.77,175.13 397.72,175.13 U0.5 ; v1(459.65,66.01) 485.41,66.01 512.03,39.39 664.01,39.39 665.92,41.29 v1(729.65,41.29) ; v1(487.44,634.87) 487.32,634.75 487.32,607.43 C14.1 R17.2 R16.1 436.1,638.73 425.96,638.73 385.11,679.58 385.11,876.24 365.35,896 269.52,896 257.22,883.7 ; Op2.10 689.87,529.1 689.87,506.16 698.18,497.85 719.11,497.85 727.43,506.16 727.43,529.1 Op2.12 728.33,590.02 ; Op2.5 688.96,696.97 690.42,698.43 690.42,852.96 687.65,855.73 687.65,881.24 696.28,889.87 721.01,889.87 729.65,881.24 ; v1(715.46,590.02) 728.33,590.02 ; v1(757.46,899.29) 755.55,897.38 745.78,897.38 729.65,881.24 ; 728.33,590.02 728.33,696.97 726.87,698.43 726.87,852.96 729.65,855.73 729.65,881.24
  Bottom Layer w10: v1(357.22,189.97) 359.01,189.97 398.62,150.35 C23.1 v1(459.65,66.01) ; v1(487.44,634.87) 684.21,634.87 701.05,618.03 701.05,607.14 715.46,592.73 v1(715.46,590.02) ; v1@729.79,41.29 882.41,41.29 918.64,77.52 918.64,857.98 877.32,899.29 v1(757.46,899.29)
X1_OpAmp_PSD1: C11.1 Op1.14 R2.1 R14.2 | length 514.4
  Top Layer w10: R2.1 209.72,194.5 200.39,194.5 192.74,202.14 192.74,236.85 223.02,267.13 326.94,267.13 357.22,297.41 357.22,324.12 343.24,338.09 343.24,345.32 306.24,382.32 306.24,420.56 306.24,469.72 R14.2 307.09,502.94 295.28,514.75 Op1.14
X1_OpAmp_PSD2: C17.1 Op2.14 R6.1 R20.2 | length 548.6
  Top Layer w10: R6.1@699.61,69.35 711.2,69.35 829.27,187.42 829.27,369.96 778.67,420.56 C17.1 778.67,421.4 778.67,469.72 R20.2 779.51,502.94 767.7,514.75 Op2.14
X1_PSD1: C11.2 Op1.13 PSD1.1 R14.1 | length 331.5
  Top Layer w10: Op1.13 R14.1 C11.2 275.59,366.74 v1(336.22,306.11)
  Bottom Layer w10: v1(336.22,306.11) PSD1.1
X1_PSD2: C17.2 Op2.13 PSD2.1 R20.1 | length 331.5
  Top Layer w10: Op2.13 R20.1 748.02,366.36 v1(808.27,306.11)
  Bottom Layer w10: v1(808.27,306.11) 808.46,306.3 808.46,388.4 PSD2.1
X2_OpAmp_PSD1: C10.2 Op1.7 R4.1 R13.2 | length 785
  Top Layer w10: C10.2 166.2,759.72 166.2,711.4 R13.2 165.35,678.18 177.17,666.37 Op1.7 114.99,651.11 82.22,618.34 82.22,244.21 200.07,126.35 209.72,126.35 R4.1
X2_OpAmp_PSD2: C16.2 Op2.7 R8.1 R19.2 | length 802.3
  Top Layer w10: C16.2 638.62,759.72 638.62,711.4 R19.2 637.78,678.18 649.59,666.37 Op2.7 587.42,651.11 557.41,621.1 557.41,305.02 599.03,263.4 664.36,263.4 688.96,238.8 R8.1
X2_PSD1: C10.1 Op1.6 PSD1.6 R13.1 | length 331.5
  Top Layer w10: v1(136.22,875) 196.85,814.37 C10.1 R13.1 Op1.6
  Bottom Layer w10: PSD1.6 v1(136.22,875)
X2_PSD2: C16.1 Op2.6 PSD2.6 R19.1 | length 331.5
  Top Layer w10: v1(608.65,875) 669.28,814.37 C16.1 R19.1 Op2.6
  Bottom Layer w10: PSD2.6 v1(608.65,875)
Y1_OpAmp_PSD1: C12.2 Op1.8 R3.1 R15.2 | length 480.5
  Top Layer w10: Op1.8 177.17,514.75 165.35,502.94 R15.2 166.2,469.72 166.2,421.4 141.9,421.4 106.66,386.16 106.66,242.4 194.6,154.46 214.1,154.46 R3.1
Y1_OpAmp_PSD2: C18.2 Op2.8 R7.1 R21.2 | length 581.2
  Top Layer w10: Op2.8 649.59,514.75 637.78,502.94 R21.2 638.62,469.72 638.62,421.4 C18.2 638.62,420.56 634.32,416.26 634.32,415.41 587.65,368.74 587.65,297.41 605.66,279.4 670.99,279.4 719.11,231.28 719.11,103.62 711.88,96.4 R7.1@687.57,96.4
Y1_PSD1: C12.1 Op1.9 PSD1.5 R15.1 | length 331.5
  Top Layer w10: v1(136.22,306.11) 196.85,366.74 C12.1 R15.1 Op1.9
  Bottom Layer w10: v1(136.22,306.11) PSD1.5
Y1_PSD2: C18.1 Op2.9 PSD2.5 R21.1 | length 331.5
  Top Layer w10: v1(608.65,306.11) 669.28,366.74 C18.1 R21.1 Op2.9
  Bottom Layer w10: v1(608.65,306.11) PSD2.5
Y2_OpAmp_PSD1: C9.1 Op1.1 R1.1 R12.2 | length 710.1
  Top Layer w10: R1.1@218.5,219.5 226.29,227.28 226.29,238.51 238.91,251.13 333.57,251.13 373.22,290.78 373.22,330.75 359.24,344.72 359.24,387.56 373.22,401.54 373.22,557.99 296.26,634.95 296.18,634.95 295.28,635.85 295.28,666.37 307.09,678.18 R12.2 306.24,711.4 306.24,759.72 C9.1
Y2_OpAmp_PSD2: C15.1 Op2.1 R5.1 R18.2 | length 1372
  Top Layer w10: R5.1 218.5,82.04 226.3,74.24 226.3,68.53 274.54,20.29 738.34,20.29 767.7,49.65 767.7,101.44 845.27,179.01 845.27,512 767.7,589.57 767.7,666.37 779.51,678.18 R18.2 778.67,711.4 778.67,759.72 C15.1
Y2_PSD1: C9.2 Op1.2 PSD1.10 R12.1 | length 331.5
  Top Layer w10: Op1.2 R12.1 C9.2 275.59,814.37 v1(336.22,875)
  Bottom Layer w10: PSD1.10 v1(336.22,875)
Y2_PSD2: C15.2 Op2.2 PSD2.10 R18.1 | length 313.5
  Top Layer w10: Op2.2 R18.1 C15.2 748.02,814.37 771.02,837.37 783.73,837.37 v1(808.65,862.29)
  Bottom Layer w10: PSD2.10 v1(808.65,862.29)
pads on no net: J1.7 J1.8 PSD1.2 PSD1.3 PSD1.4 PSD1.7 PSD1.9 PSD2.2 PSD2.3 PSD2.4 PSD2.7 PSD2.9 U0.2 U0.3 U0.18 U0.19 U0.20 U0.23 U0.26 U0.27
copper on no net: | length 4170.9
  Top Layer w10: 0,47.24 ccw(c47.24,47.24) 47.24,0 897.64,0 ccw(c897.64,47.24) 944.88,47.24 944.88,1133.86 ccw(c897.64,1133.86) 897.64,1181.1 47.24,1181.1 ccw(c47.24,1133.86) 0,1133.86 0,47.24

## Polygon pours and split planes (outlines as drawn)
DGND on Bottom Layer "DGND_L02_P001" (solid, pour order 1): 47.24,0 897.64,0 ccw(c897.64,47.24) 944.88,47.24 944.88,1133.86 ccw(c897.64,1133.86) 897.64,1181.1 47.24,1181.1 ccw(c47.24,1133.86) 0,1133.86 0,47.24 ccw(c47.24,47.24)
DGND on Top Layer "DGND_L01_P000" (solid, pour order 0): 47.24,0 897.64,0 ccw(c897.64,47.24) 944.88,47.24 944.88,1133.86 ccw(c897.64,1133.86) 897.64,1181.1 47.24,1181.1 ccw(c47.24,1133.86) 0,1133.86 0,47.24 ccw(c47.24,47.24)